# Altium PCB Greinke_Boost_Converter_Motor.PcbDoc
Units mil, origin at the board's own origin, x right, y up, seen from the top; angles counter-clockwise.
Board outline 2985 x 2206.58 mil, 2 copper layers (Top Layer, Bottom Layer); 18 components, 31 nets, 55 pads, 7 vias.
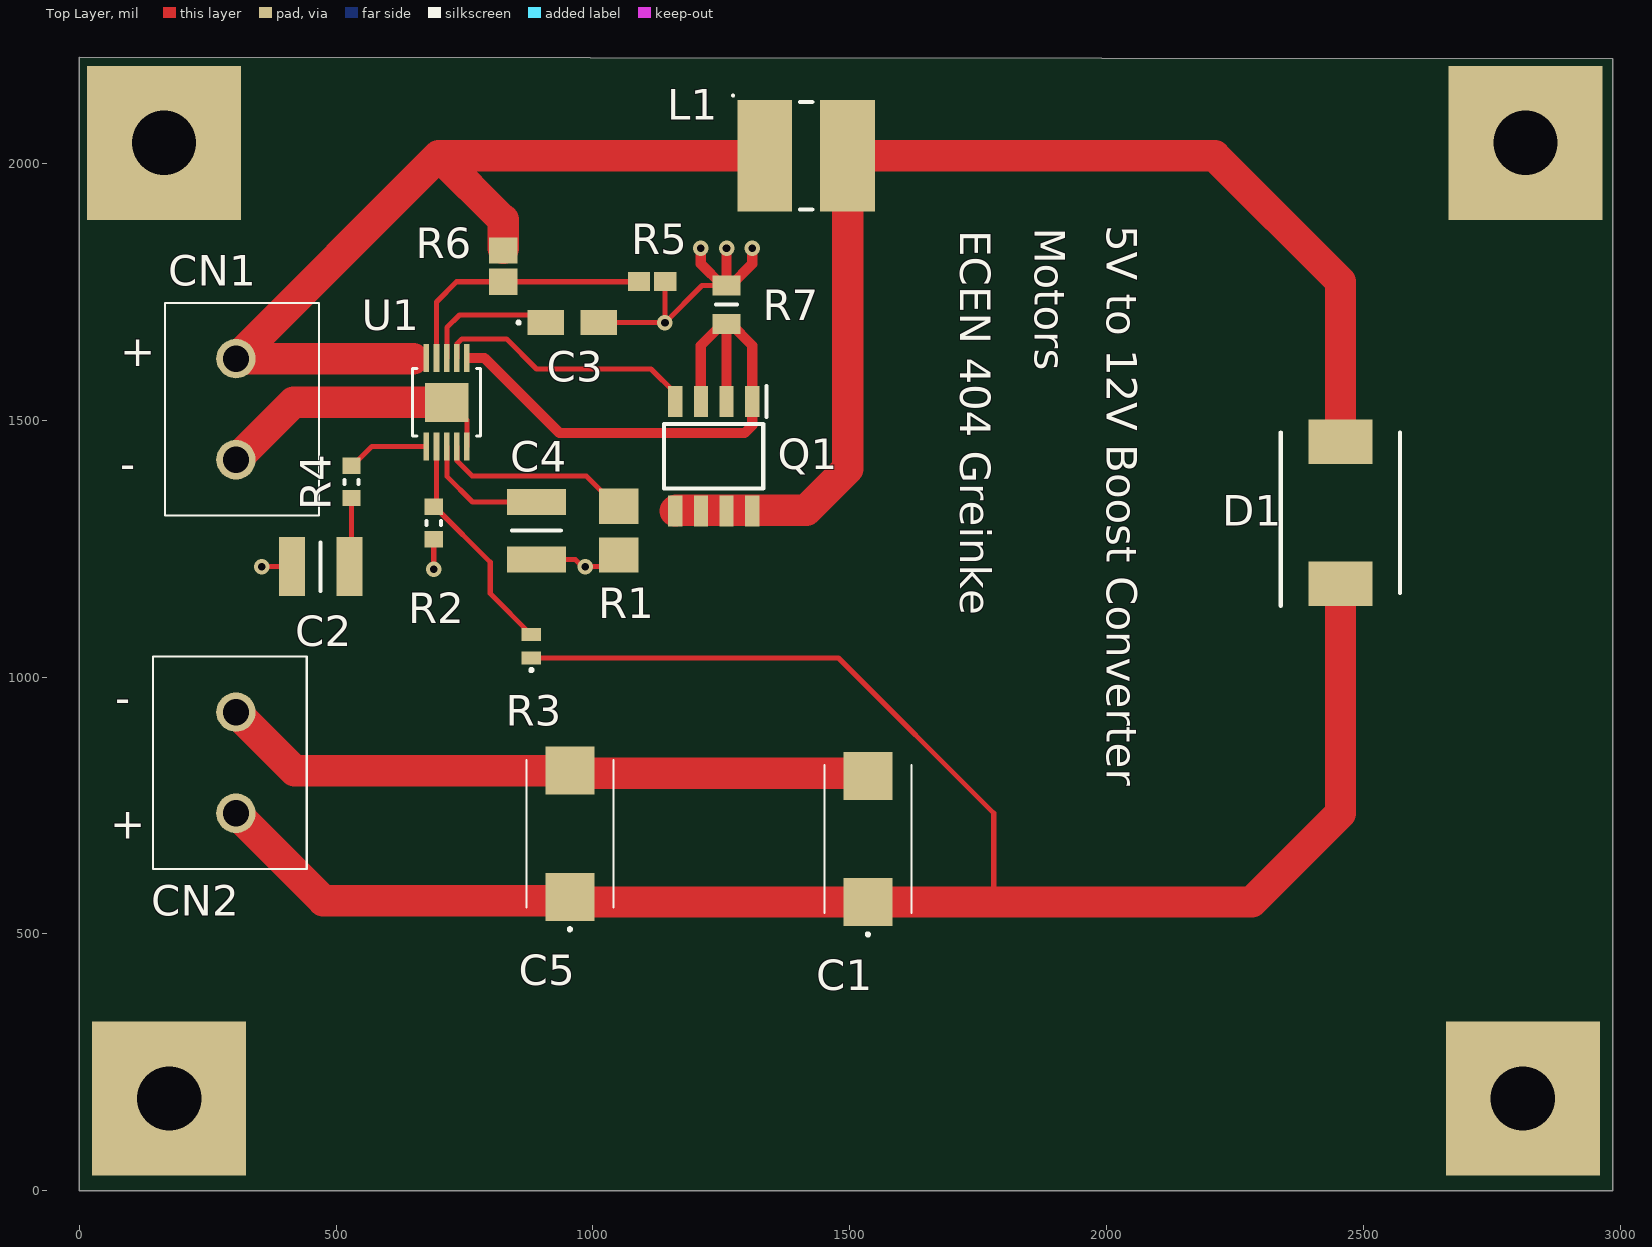
[diagram p0: Top Layer view]
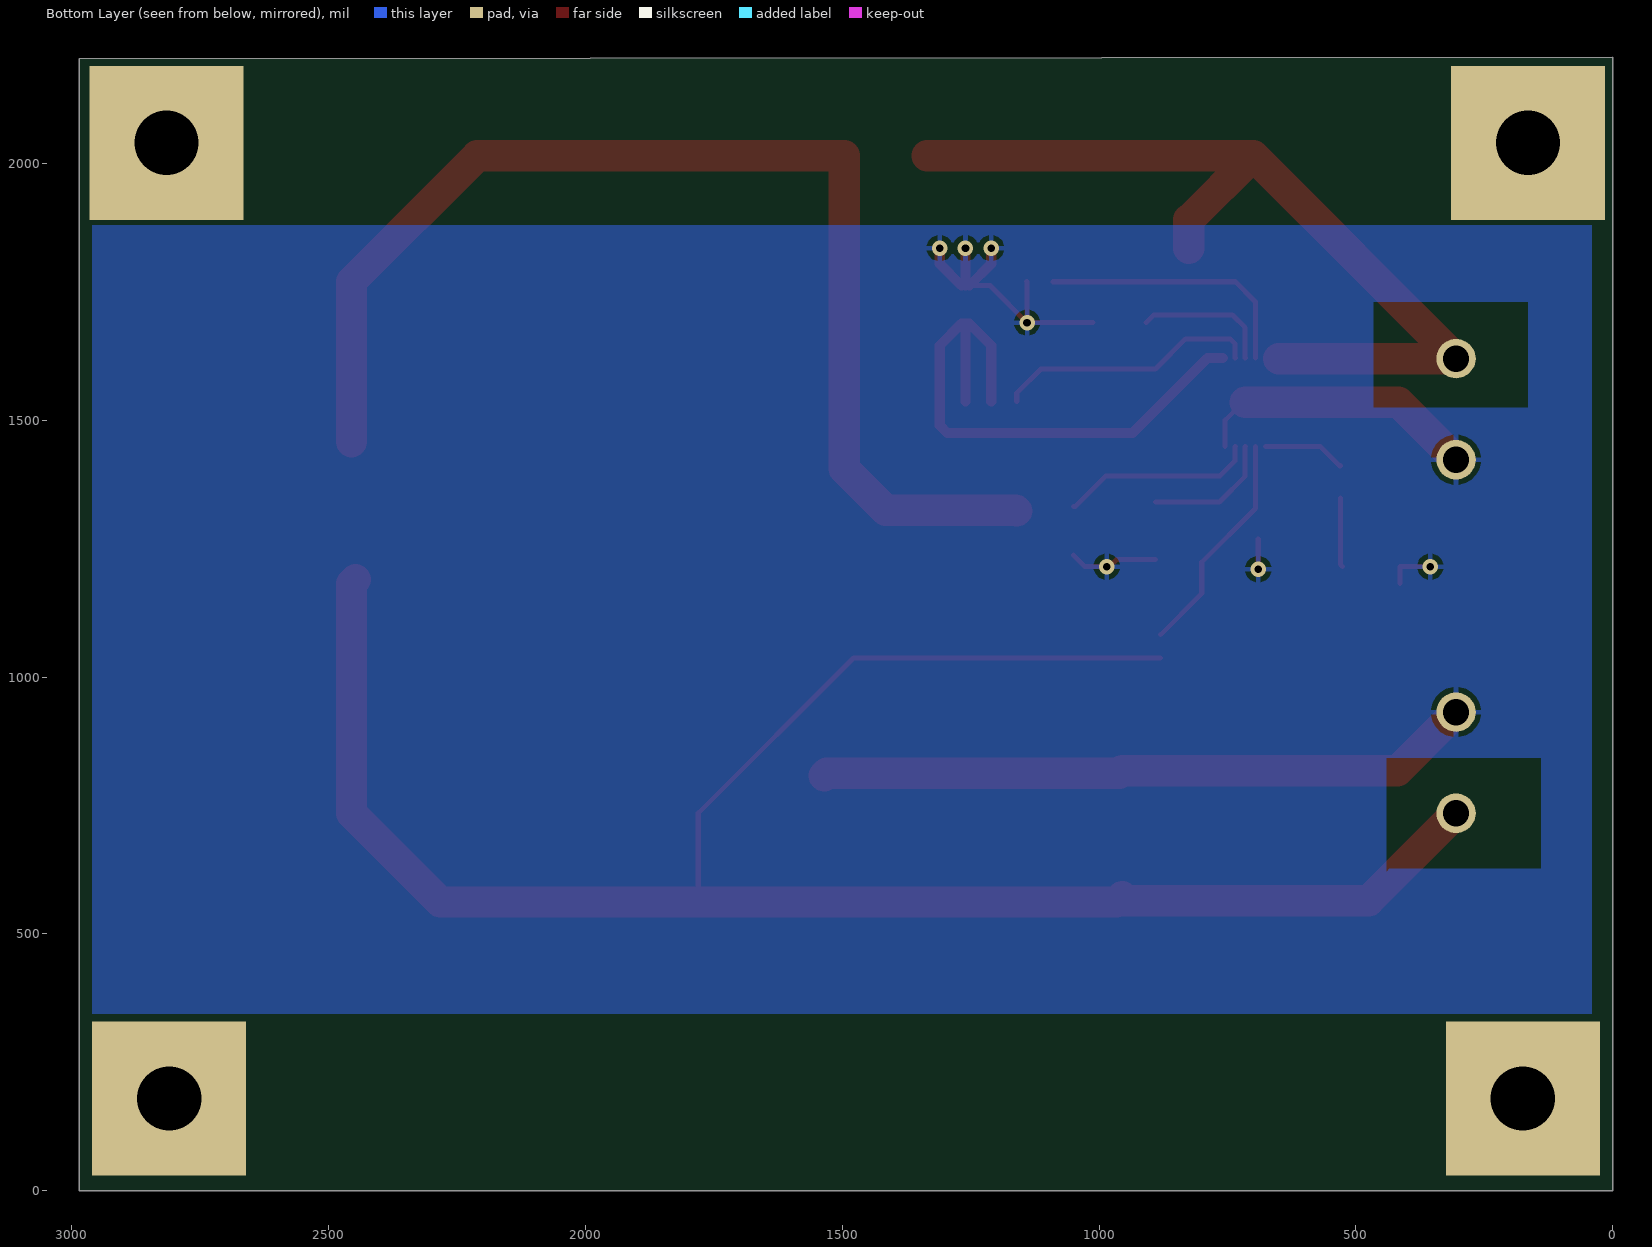
[diagram p1: Bottom Layer view, seen from below]

## Layer stack, top to bottom
Top Solder: solder mask 0.4, Solder Resist, Dk 3.5
Top Layer: signal copper 1.4
Dielectric 1: dielectric 12.6, FR-4, Dk 4.8
Bottom Layer: signal copper 1.4
Bottom Solder: solder mask 0.4, Solder Resist, Dk 3.5

## Board outline
0,2206.58 0,0 2985,0 2985,2203.47

## Design rules (kind name [scope] priority, off if disabled: settings)
Clearance [All] p1: gap=5 ignorepadtopadclearanceinfootprint=FALSE
HoleSize [All] p1: absolutevalues=TRUE maxlimit=200 minlimit=10 maxpercent=80.000 minpercent=20.000
PolygonConnect [All] p1: connectstyle=Relief reliefconductorwidth=10 reliefentries=4 polygonreliefangle="90 Angle" airgapwidth=10
RoutingVias [All] p1: holewidth=28 width=50 viastyle="Through Hole" minholewidth=15 minwidth=30 maxholewidth=50 maxwidth=100
SolderMaskExpansion [All] p1: expansion=4 istentingtop=FALSE
Width [All] p1: maxlimit=200 minlimit=5 preferedwidth=10
29 further rules are at their usual default settings.

## Components (designator, comment, footprint, x,y, rotation, side; value= is the part's Value field where it differs from the comment)
C1 "6.8uF" "6.8U CAPACITOR" 1535,685 r90 top
C2 "6800pF" "6800P CAPACITOR" 465,1215 r180 top
C3 "4.7uF" "4.7U CAPACITOR" 960,1690 r0 top
C4 "0.01uF" "0.01U CAPACITOR" 890,1290 r90 top
C5 "6.8uF" "6.8U CAPACITOR" 955,695 r90 top
CN1 "Connector" "2 TERMINAL BLOCKS" 305,1620 r270 top
CN2 "Connector" "2 TERMINAL BLOCKS" 305,735 r90 top
D1 "Schottkey Diode" MBRS340 2455,1320 r90 top
L1 "4.7uH" 744774047 1415,2015 r0 top
Q1 "FDS8880" FDS8880 1235,1430 r270 top
R1 "24.3k" "24.3K RESISTOR" 1050,1285 r270 top
R2 "11k" "11K RESISTOR" 690,1300 r270 top
R3 "71.5k" "71.5K RESISTOR" 880,1060 r90 top
R4 "22k" "22K RESISTOR" 530,1380 r270 top
R5 "10k" "10K RESISTOR" 1115,1770 r0 top
R6 "14.7k" "14.7K RESISTOR" 825,1800 r270 top
R7 "25m" "25M RESISTOR" 1260,1725 r90 top
U1 "LT3757" LT3757 715,1535 r90 top

## Footprints (in the part's own frame and the unit in brackets; to place one, negate y for a bottom-side part, rotate by r counter-clockwise, add the part's x,y. Pads: shape width x height; smd on the part's side, far side on the other; paste and mask are expansions set on the pad)
"0.01U CAPACITOR" [mm]
  rect 1.28x2.92 smd: 1(-1.547,0) 2(1.293,0)
  silkscreen extent -0.13,-1.2 -0.13,1.2
"2 TERMINAL BLOCKS" [mm]
  round 1.95 hole 1.3: 1(0,0) 2(5,0)
  silkscreen extent -2.75,-3.5 7.75,4.1
"4.7U CAPACITOR" [mm]
  rect 1.8x1.23 smd: 1(-1.31,0) 2(1.31,0)
  silkscreen extent -2.71,-0.05 -2.61,0.05
"6.8U CAPACITOR" [mm]
  rect 2.37x2.43 smd: 1(-3.12,0) 2(3.12,0)
  silkscreen extent -4.77,-2.15 3.65,2.15
"10K RESISTOR" [mm]
  rect 1.1x0.95 smd: 1(-0.65,0) 2(0.65,0)
"11K RESISTOR" [mm] "Chip Resistor, 2-Leads, Body 1.60x0.80mm, IPC Medium Density"
  rect 0.8x0.9 smd: 1(-0.8,0) 2(0.8,0)
  silkscreen extent -0.1,-0.35 0.1,0.35, body extent -0.85,-0.45 0.85,0.45, height 0.55
"14.7K RESISTOR" [mm] "Chip Resistor, 2-Leads, Body 2.00x1.25mm, IPC Medium Density"
  rect 1.3x1.4 smd: 1(-0.775,0) 2(0.775,0)
  body extent -1.07,-0.7 1.07,0.7, height 0.58
"22K RESISTOR" [mm] "Chip Resistor, 2-Leads, Body 1.60x0.80mm, IPC Medium Density"
  rect 0.8x0.9 smd: 1(-0.8,0) 2(0.8,0)
  silkscreen extent -0.1,-0.35 0.1,0.35, body extent -0.85,-0.45 0.85,0.45, height 0.55
"24.3K RESISTOR" [mm] "Chip Resistor, 2-Leads, Body 3.05x1.55mm, IPC Medium Density"
  rect 1.75x1.95 smd: 1(-1.2,0) 2(1.2,0)
  body extent -1.73,-0.95 1.73,0.95, height 0.58
"25M RESISTOR" [mm]
  rect 1x1.4 smd: 1(-0.95,0) 2(0.95,0)
  silkscreen extent 0,-0.53 0,0.53
"71.5K RESISTOR" [mm]
  rect 0.65x0.95 smd: 1(-0.575,0) 2(0.575,0)
  silkscreen extent -1.22,-0.05 -1.13,0.05
"6800P CAPACITOR" [mm]
  rect 1.28x2.92 smd: 1(-1.547,0) 2(1.293,0)
  silkscreen extent -0.13,-1.2 -0.13,1.2
744774047 [mm] "Chip Inductor, 2-Leads, Body 5.80x5.20mm, IPC Medium Density"
  rect 2.71x5.52 smd: 1(-2.05,0) 2(2.05,0)
  silkscreen extent -3.67,-2.66 0.3,3.02, body extent -3.05,-2.75 3.05,2.75, height 4.85
FDS8880 [mm]
  rect 1.525x0.7 smd: 1(-2.712,1.905) 2(-2.712,0.635) 3(-2.712,-0.635) 4(-2.712,-1.905) 5(2.712,-1.905) 6(2.712,-0.635) 7(2.712,0.635) 8(2.712,1.905)
  silkscreen extent -3.47,-2.45 1.6,2.61
LT3757 [mil]
  rect 55x11 smd: 1(-86,39.4) 2(-86,19.7) 3(-86,0) 4(-86,-19.7) 5(-86,-39.4) 6(86,-39.4) 7(86,-19.7) 8(86,0) 9(86,19.7) 10(86,39.4)
  rect 76x85 smd paste-78.74: 11(0,0)
  silkscreen extent -66,-66 66,66, body extent -59,-96 59,96, height 20
MBRS340 [mm]
  rect 2.2x3.15 smd: 1(-3.5,0) 2(3.5,0)
  silkscreen extent -4.6,-2.95 3.97,2.95

## Part data
C1 C5: library part "6.8u Capacitor"
C2: library part "6800p Capacitor"
C3: library part "4.7u Capacitor"
C4: library part "0.01u Capacitor_1"
CN1 CN2: library part "2 Terminal Blocks"
D1: library part MBRS340
L1: library part 744774047
R1: library part "24.3k Resistor"
R2: library part "11k Resistor"
R3: library part "71.5k Resistor"
R4: library part "22k Resistor"
R5: library part "10k Resistor"
R6: library part "14.7k Resistor"
R7: library part "25m Resistor"

## Free pads (board coordinates)
  rect 300x300 hole 125: MH(165,2040) MH(175,180) MH(2810,180) MH(2815,2040)

## Via types
v1: diameter 30, hole 15, Top Layer to Bottom Layer, 7 vias

## Nets (pads, with @x,y where several pads share a name; then routed paths per layer and width w, separated by ;. In a path a pad name is that pad's centre, name@x,y a point inside that pad or via, vN(x,y) a via of type N, cw(c..) or ccw(c..) an arc to the next point about the centre after c; other vN are vias at no path point)
NetC1_1: C1.1 C5.1 CN2.1 D1.1 R3.1 | length 3955.4
  Top Layer w10: R3.1 1477.64,1037.36 1780,735 1780,562.17
  Top Layer w61: CN2.1 CN2.1@305,739.27 ; CN2.1@308.02,731.98 475,565 947.83,565 C5.1 965,562.17 C1.1 1780,562.17 2282.17,562.17 2455,735 D1.1 D1.1@2447.2,1190
NetC1_2: C1.2 C2.2 C3.2 C4.1 C5.2 CN1.2 CN2.2 R1.2 R2.2 R5.2 R7.2 U1.5 U1.11 | length 2779.2
  Top Layer w10: v1(355,1215) C2.2 C2.2@414.09,1182.72 ; v1(690,1210) R2.2 ; U1.11 719.5,1535 754.4,1500.1 U1.5 ; C4.1 965.49,1229.09 979.59,1215 v1(985,1215) 1027.24,1215 R1.2 ; C3.2 v1(1140,1690) ; R5.2 1140,1769.41 v1(1140,1690) ; R7.2 1252.13,1762.4 1212.4,1762.4 v1(1140,1690)
  Top Layer w20: v1(1210,1835) 1210,1804.53 R7.2@1252.13,1762.4 ; R7.2 v1(1260,1835) ; R7.2@1267.87,1762.4 1310,1804.53 v1(1310,1835)
  Top Layer w61: CN2.2 419.02,817.83 C5.2 960,812.83 1530,812.83 C1.2 ; CN1.2 416.85,1535 U1.11
NetC2_1: C2.1 R4.2 | length 135.2
  Top Layer w10: C2.1 530,1219.09 R4.2
NetC3_1: C3.1 U1.8 | length 269
  Top Layer w10: U1.8 715.5,1621.5 715.5,1680.5 740,1705 893.43,1705 C3.1
NetC4_2: C4.2 U1.3 | length 253.5
  Top Layer w10: U1.3 715.5,1448.5 715.5,1390.85 765.45,1340.91 C4.2
NetC11_1: 
NetC11_2: 
NetC22_1: 
NetC33_1: 
NetC44_2: 
NetCN1_1: CN1.1 L1.1 R6.1 U1.10 | length 1769.7
  Top Layer w61: 650,1620 CN1.1 700,2015 ; R6.1@825,1835 825,1890 700,2015 ; L1.1 700,2015
NetCN11_1: 
NetCN11_2: 
NetCN11_3: 
NetD1_2: D1.2 L1.2 Q1.5 Q1.6 Q1.7 Q1.8 | length 2352.1
  Top Layer w61: Q1.5 1161.77,1325 1415,1325 1495.71,1405.71 L1.2 2210,2015 2455,1770 D1.2
NetD11_2: 
NetL11_1: 
NetQ1_1: Q1.1 Q1.2 Q1.3 R7.1 U1.6 | length 1167.7
  Top Layer w20: U1.6@758.9,1621 789,1621 935,1475 1295,1475 1310,1490 Q1.1 1310,1645.47 1267.87,1687.6 R7.1 ; Q1.3 1210,1645.47 1252.13,1687.6 R7.1 ; Q1.2 R7.1
NetQ1_4: Q1.4 U1.7 | length 516.8
  Top Layer w10: U1.7 735.2,1621.5 735.2,1648.94 744.76,1658.5 831.5,1658.5 890,1600 1113.01,1600 1160,1553.01 Q1.4
NetQ11_1: 
NetQ11_2: 
NetQ11_4: 
NetQ11_6: 
NetR1_1: R1.1 U1.4 | length 379.7
  Top Layer w10: U1.4 735.2,1448.5 735.2,1421.06 764.88,1391.38 986.93,1391.38 1046.06,1332.24 R1.1
NetR2_1: R2.1 R3.2 U1.2 | length 442.9
  Top Layer w10: U1.2 695.3,1328.16 800,1223.46 800,1162.64 R3.2
NetR4_1: R4.1 U1.1 | length 161.1
  Top Layer w10: R4.1 531.97,1411.5 569.47,1449 U1.1
NetR5_1: R5.1 R6.2 U1.9 | length 519.6
  Top Layer w10: U1.9 695.3,1730.3 734.49,1769.49 R6.2 R5.1@1089.41,1769.49
NetR11_1: 
NetR22_1: 
NetR44_1: 
NetR55_1: 

## Polygon pours and split planes (outlines as drawn)
NetC1_2 on Bottom Layer "GND" (solid, pour order 1): 40.68,1880 2960,1880 2960,345 40.68,345

## Other copper
Bottom Layer:
  pour cut-out: 140,842.5 440,842.5 440,622.5 435,627.5 140,627.5
Multi-Layer:
  pour cut-out: 165,1730 460,1730 465,1730 465,1525 165,1525

## Silkscreen, mask and mechanical layers (free items; w line width, h text height)
Top Overlay:
  text "5V to 12V Boost Converter" at 2000,1880 h60 r270
  text "Motors" at 1860,1875 h60 r270
  text "ECEN 404 Greinke" at 1715,1870 h60 r270
  text "+" at 80,1605 h60
  text "-" at 80,1385.01 h60
  text "-" at 70,930.01 h60
  text "+" at 60,685 h60
Board Outline:
  lines w10: 0,0 2985,0 2985,2204.72 0,2204.72 0,0